# EAGLE board irBoard_X4 (EAGLE 6.6.0)
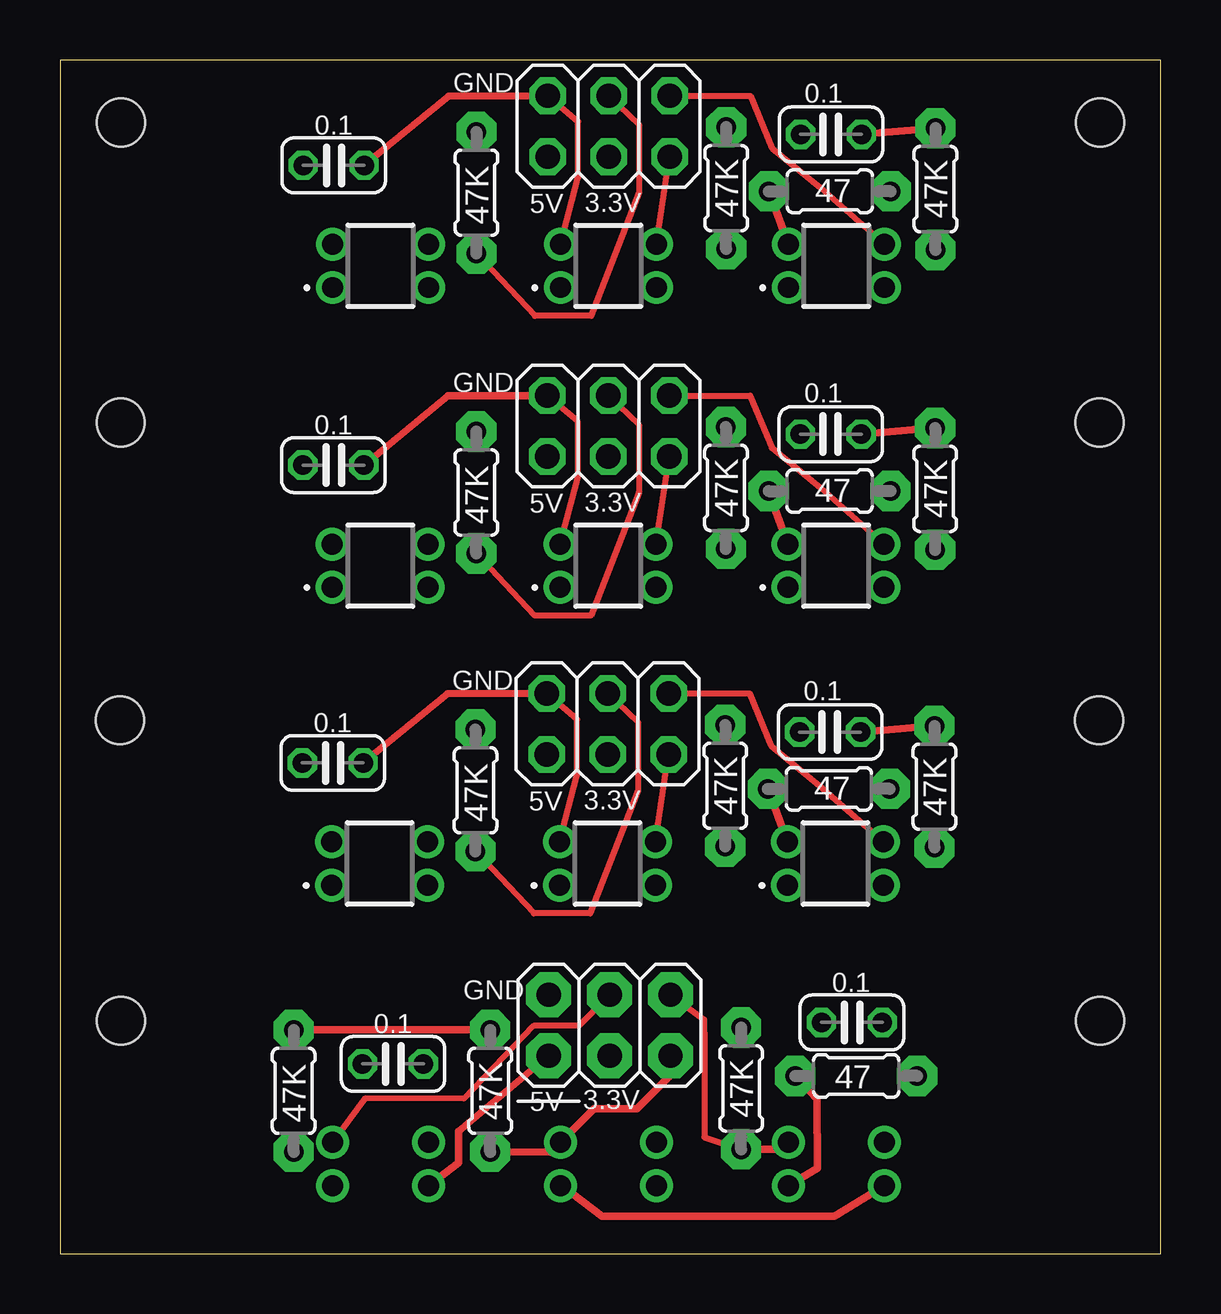
[diagram p0: board, top side]
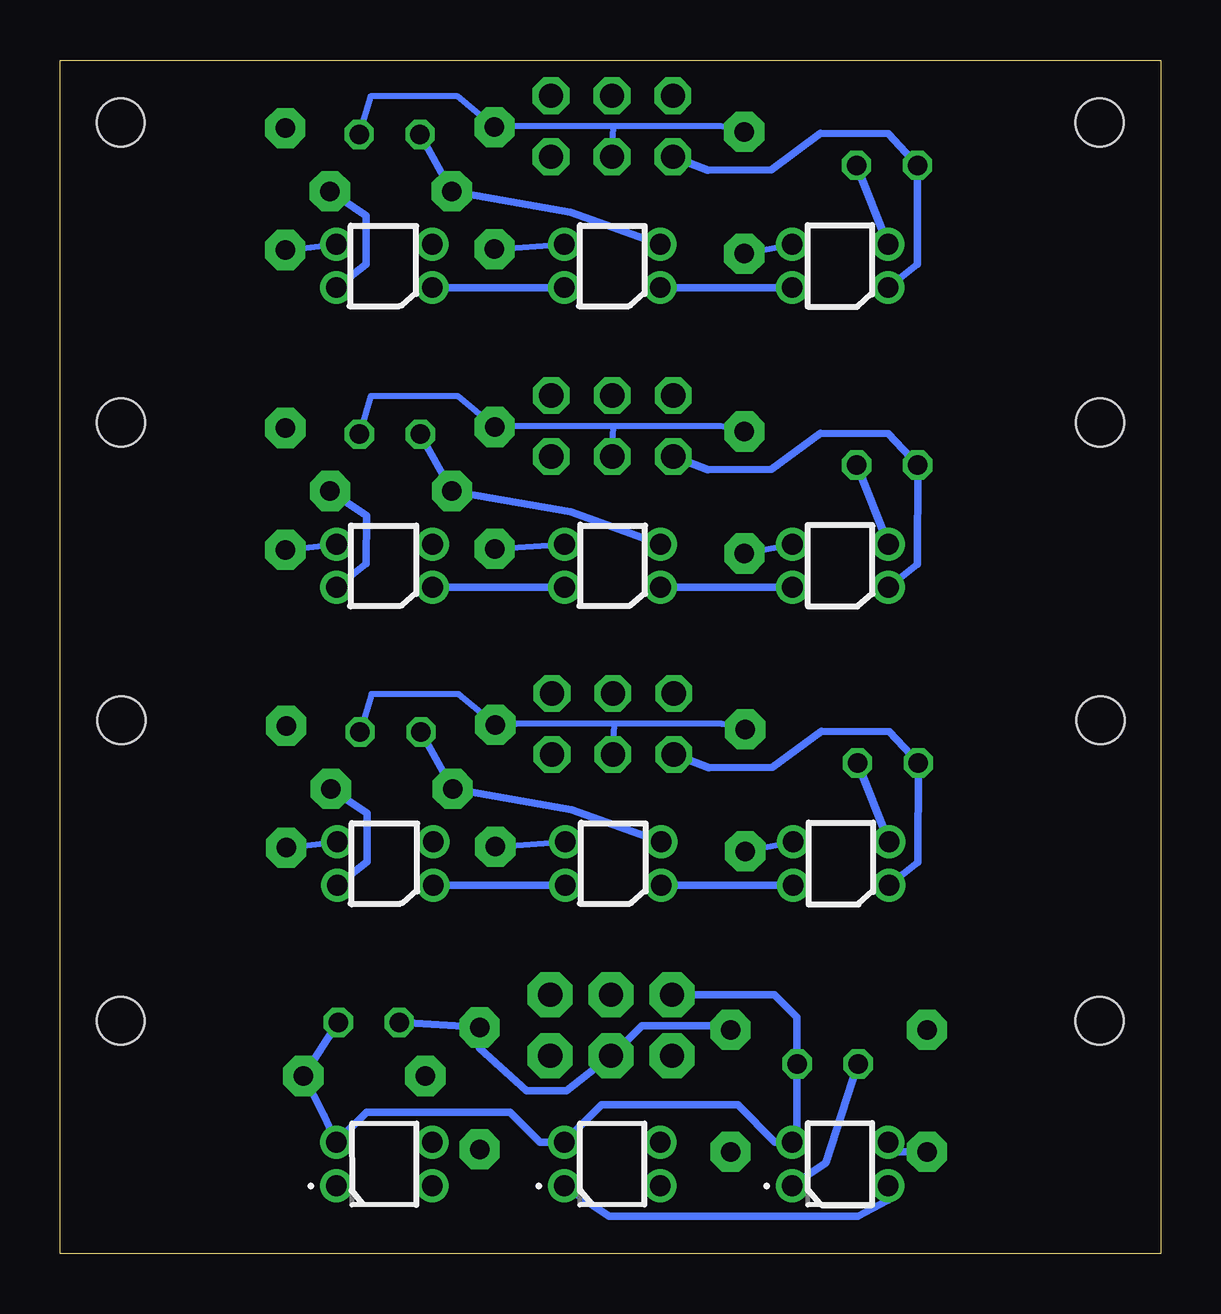
[diagram p1: board, bottom side, seen from below]

Size 45.88 x 49.74 mm. Coordinates in mm from the lower left corner, seen from the top.
Outline: 0,0 45.88,0 45.88,49.74 0,49.74 0,0
Copper layers (1*2*15*16): Top 0.035mm / dielectric 0.2mm / Route2 0.0175mm / dielectric 1.1mm / Route15 0.0175mm / dielectric 0.2mm / Bottom 0.035mm
Design rules "SeeedStudio_DRU_no_angle": minimum track width 6mil, minimum drill 12mil, track to track 6mil, track to pad 6mil, pad to pad 6mil, via to via 6mil, smd to smd 0mil, copper to edge 10mil, drill to drill 10mil, minimum pad ring 6mil, minimum via ring 6mil, stop-mask expansion 2mil, vias tented up to drill 25mil, thermal gap 10mil
Holes 2 mm at 2.54,9.71 43.35,9.71 2.5,22.23 43.31,22.23 2.54,47.13 43.35,47.13 2.53,34.64 43.34,34.64

## Footprints (pad centres in the part's own frame; a part is rotated, then mirrored left to right if it is on the bottom)
C025-024X044 = drill 0.813 octagon: 1 -1.27,0; 2 1.27,0
QRE1113 = drill 0.87 pad 1.37: 1 -2,-0.9; 2 2,-0.9; 3 2,0.9; 4 -2,0.9
2X03 = drill 1.016 pad 1.88 octagon: 1 -2.54,-1.27; 2 -2.54,1.27; 3 0,-1.27; 4 0,1.27; 5 2.54,-1.27; 6 2.54,1.27
2X03' = drill 1.016 octagon: 1 -2.54,-1.27; 2 -2.54,1.27; 3 0,-1.27; 4 0,1.27; 5 2.54,-1.27; 6 2.54,1.27
0204/5 = drill 0.813 pad 1.676 octagon: 1 -2.54,0; 2 2.54,0

## Placement (x,y rotation side)
C1  0.1  [C025-024X044]  13.88,7.91 0 top
C2  0.1  [C025-024X044]  33.01,9.64 0 top
C3  0.1  [C025-024X044]  11.41,45.35 0 top
C4  0.1  [C025-024X044]  32.14,46.64 180 top
C5  0.1  [C025-024X044]  11.4,32.86 0 top
C6  0.1  [C025-024X044]  32.13,34.15 180 top
C9  0.1  [C025-024X044]  11.37,20.45 0 top
C10  0.1  [C025-024X044]  32.1,21.74 180 top
D1  QRE1113  [QRE1113]  13.36,3.74 0 bottom
D2  QRE1113  [QRE1113]  22.86,3.74 0 bottom
D3  QRE1113  [QRE1113]  32.36,3.74 0 bottom
D4  QRE1113  [QRE1113]  13.36,41.16 0 top
D5  QRE1113  [QRE1113]  22.86,41.16 0 top
D6  QRE1113  [QRE1113]  32.36,41.16 0 top
D7  QRE1113  [QRE1113]  13.35,28.67 0 top
D8  QRE1113  [QRE1113]  22.85,28.67 0 top
D9  QRE1113  [QRE1113]  32.35,28.67 0 top
D13  QRE1113  [QRE1113]  13.32,16.26 0 top
D14  QRE1113  [QRE1113]  22.82,16.26 0 top
D15  QRE1113  [QRE1113]  32.32,16.26 0 top
J1  [2X03]  22.91,9.52 0 top
JP1  [2X03']  22.83,22.08 0 top
JP2  [2X03']  22.87,46.98 0 top
JP3  [2X03']  22.86,34.49 0 top
R1  47  [0204/5]  33.19,7.41 180 top
R2  47K  [0204/5]  28.39,6.89 90 top
R3  47K  [0204/5]  17.93,6.79 90 top
R4  47K  [0204/5]  9.74,6.79 90 top
R5  47  [0204/5]  32.09,44.27 0 top
R6  47K  [0204/5]  36.49,44.36 90 top
R7  47K  [0204/5]  27.77,44.4 90 top
R8  47K  [0204/5]  17.36,44.21 90 top
R9  47  [0204/5]  32.08,31.78 0 top
R10  47K  [0204/5]  36.48,31.87 90 top
R11  47K  [0204/5]  27.76,31.91 90 top
R12  47K  [0204/5]  17.35,31.72 90 top
R17  47  [0204/5]  32.05,19.37 0 top
R18  47K  [0204/5]  36.45,19.46 90 top
R19  47K  [0204/5]  27.73,19.5 90 top
R20  47K  [0204/5]  17.32,19.31 90 top

## Library data of the parts
C1-C6 C9 C10 = resistor
D1-D9 D13-D15 = QRE1113; ARROW_PART_NUMBER: QRE1113; ARROW_PRICE/STOCK: http://uk.rs-online.com/web/p/products/8629400; DESCRIPTION: Miniature Reflective Object Sensor Fairchild QRE1113, Through Hole Reflective Sensor, Phototransistor Output, Miniature package; HEIGHT: mm; MANUFACTURER_NAME: Fairchild Semiconductor; MANUFACTURER_PART_NUMBER: QRE1113; RS_PART_NUMBER: 8629400; RS_PRICE/STOCK: http://uk.rs-online.com/web/p/products/8629400
J1 = SparkFun-Retired
JP1-JP3 = pinhead
R1-R12 R17-R20 = adafruit

## Nets
3.1: C4.1 JP2.3 R6.2 R7.2 R8.2
3.2: C6.1 JP3.3 R10.2 R11.2 R12.2
3.3: C2.1 J1.3 R2.2 R3.2 R4.2
3.5: C10.1 JP1.3 R18.2 R19.2 R20.2
5V: C1.1 D1.1 J1.1
5V1: C3.1 D4.1 JP2.1
5V2: C5.1 D7.1 JP3.1
5V4: C9.1 D13.1 JP1.1
GND: C1.2 C2.2 D1.4 D2.4 D3.4 J1.2 R1.1
GND1: C3.2 C4.2 D4.4 D5.4 D6.4 JP2.2 R5.1
GND2: C5.2 C6.2 D7.4 D8.4 D9.4 JP3.2 R9.1
GND4: C9.2 C10.2 D13.4 D14.4 D15.4 JP1.2 R17.1
N$1: D2.2 D3.1
N$2: D1.2 D2.1
N$3: D5.2 D6.1
N$4: D3.2 R1.2
N$5: D4.2 D5.1
N$6: D6.2 R5.2
N$7: D1.3 J1.4 R4.1
N$8: D2.3 J1.5 R3.1
N$9: D3.3 J1.6 R2.1
N$10: D4.3 JP2.4 R8.1
N$11: D5.3 JP2.5 R7.1
N$12: D6.3 JP2.6 R6.1
N$13: D8.2 D9.1
N$14: D7.2 D8.1
N$15: D9.2 R9.2
N$16: D7.3 JP3.4 R12.1
N$17: D8.3 JP3.5 R11.1
N$18: D9.3 JP3.6 R10.1
N$25: D14.2 D15.1
N$26: D13.2 D14.1
N$27: D15.2 R17.2
N$28: D13.3 JP1.4 R20.1
N$29: D14.3 JP1.5 R19.1
N$30: D15.3 JP1.6 R18.1

## Tracks (layer width: path | path; a pad name or v marks a point on that pad's centre or on a via)
3.1
  Top 0.305: R6.2 C4.1
  Bottom 0.254: C4.1 32.94,48.22 29.3,48.22 R7.2 26.9,46.98 22.81,46.98 | JP2.3 22.81,46.98 | R8.2 18.34,46.98 22.81,46.98
3.2
  Top 0.305: R10.2 C6.1
  Bottom 0.254: C6.1 32.93,35.73 29.29,35.73 R11.2 26.89,34.49 22.8,34.49 | JP3.3 22.8,34.49 | R12.2 18.33,34.49 22.8,34.49
3.3
  Top 0.305: R4.2 R3.2 17.96,9.33
  Bottom 0.305: R3.2 18.15,9.5 21.63,9.5 22.88,8.25 J1.3 24.76,6.8 26.43,6.8 28.39,8.56 R2.2 C2.1
3.5
  Top 0.305: R18.2 C10.1
  Bottom 0.254: C10.1 32.9,23.32 29.26,23.32 R19.2 26.86,22.08 22.77,22.08 | JP1.3 22.77,22.08 | R20.2 18.3,22.08 22.77,22.08
5V
  Top 0.305: D1.1 16.62,3.79 16.61,5.11 J1.1
  Bottom 0.305: C1.1 13.96,3.8 D1.1
5V1
  Bottom 0.305: D4.1 10.15,41.22 C3.1 11.35,46.66 14.19,46.68 16.23,45.17 18.87,45.15 JP2.1
5V2
  Bottom 0.305: D7.1 10.14,28.73 C5.1 11.34,34.17 14.18,34.19 16.22,32.68 18.86,32.66 JP3.1
5V4
  Bottom 0.305: D13.1 10.11,16.32 C9.1 11.31,21.76 14.15,21.78 16.19,20.27 18.83,20.25 JP1.1
GND
  Bottom 0.305: J1.2 16.1,10.79 15.17,9.86 15.17,7.61 | 15.17,7.61 15.17,4.83 D1.4 16.07,4.64 17.63,6.2 23.3,6.2 D2.4 25.87,4.64 27.13,5.9 33.1,5.9 D3.4 34.86,5.75 R1.1 C2.2 | C1.2 15.17,7.61
GND1
  Top 0.254: D5.4 21.6,44.85 21.6,47.17 JP2.2
  Top 0.305: R5.1 D6.4 | C3.2 16.19,48.24 JP2.2
  Bottom 0.305: D4.4 C3.2 | C4.2 R5.1 24.6,43.4 D5.4
GND2
  Top 0.254: D8.4 21.59,32.36 21.59,34.68 JP3.2
  Top 0.305: R9.1 D9.4 | C5.2 16.18,35.75 JP3.2
  Bottom 0.305: D7.4 C5.2 | C6.2 R9.1 24.59,30.91 D8.4
GND4
  Top 0.254: D14.4 21.56,19.95 21.56,22.27 JP1.2
  Top 0.305: R17.1 D15.4 | C9.2 16.15,23.34 JP1.2
  Bottom 0.305: D13.4 C9.2 | C10.2 R17.1 24.56,18.5 D14.4
N$1
  Top 0.305: D2.2 20.92,2.84 22.59,1.57 32.29,1.57 D3.1
N$2
  Bottom 0.305: D1.2 11.36,2.24 12.63,1.57 22.99,1.57 D2.1
N$3
  Bottom 0.305: D6.1 D5.2
N$4
  Top 0.305: D3.2 31.58,3.57 31.55,6.45 R1.2
N$5
  Bottom 0.305: D5.1 D4.2
N$6
  Bottom 0.305: D6.2 33.12,41.24 33.11,43.25 R5.2
N$7
  Top 0.254: J1.4 21.63,9.5 19.73,9.5 16.84,6.46 12.72,6.47 D1.3
  Bottom 0.305: R4.1 10.97,4.25 D1.3
N$8
  Top 0.305: R3.1 20.46,4.24 D2.3 22.27,6.05 24.06,6.05 25.45,7.44 J1.5
N$9
  Top 0.254: J1.6 26.85,9.76 26.86,8.76 26.86,4.86 R2.1 | 30.07,4.35 D3.3
  Top 0.305: R2.1 30.07,4.35
N$10
  Top 0.254: JP2.4 24.14,47.04 24.14,44.22 22.14,39.08 19.8,39.08 R8.1
  Bottom 0.254: R8.1 D4.3
N$11
  Top 0.254: D5.3 JP2.5
  Bottom 0.254: R7.1 D5.3
N$12
  Top 0.254: JP2.6 28.78,48.25 29.68,46.07 31.7,44.41 D6.3
  Bottom 0.254: R6.1 D6.3
N$13
  Bottom 0.305: D9.1 D8.2
N$14
  Bottom 0.305: D8.1 D7.2
N$15
  Bottom 0.305: D9.2 33.11,28.75 33.1,30.76 R9.2
N$16
  Top 0.254: JP3.4 24.13,34.55 24.13,31.73 22.13,26.59 19.79,26.59 R12.1
  Bottom 0.254: R12.1 D7.3
N$17
  Top 0.254: D8.3 JP3.5
  Bottom 0.254: R11.1 D8.3
N$18
  Top 0.254: JP3.6 28.77,35.76 29.67,33.58 31.69,31.92 D9.3
  Bottom 0.254: R10.1 D9.3
N$25
  Bottom 0.305: D15.1 D14.2
N$26
  Bottom 0.305: D14.1 D13.2
N$27
  Bottom 0.305: D15.2 33.08,16.34 33.07,18.35 R17.2
N$28
  Top 0.254: JP1.4 24.1,22.14 24.1,19.32 22.1,14.18 19.76,14.18 R20.1
  Bottom 0.254: R20.1 D13.3
N$29
  Top 0.254: D14.3 JP1.5
  Bottom 0.254: R19.1 D14.3
N$30
  Top 0.254: JP1.6 28.74,23.35 29.64,21.17 31.66,19.51 D15.3
  Bottom 0.254: R18.1 D15.3

## Text on the board
tPlace: GND | 5V | 3.3V | GND | 5V | 3.3V | GND | 3.3V | 5V | GND | 5V | 3.3V